# EAGLE board Board (EAGLE 9.7.0)
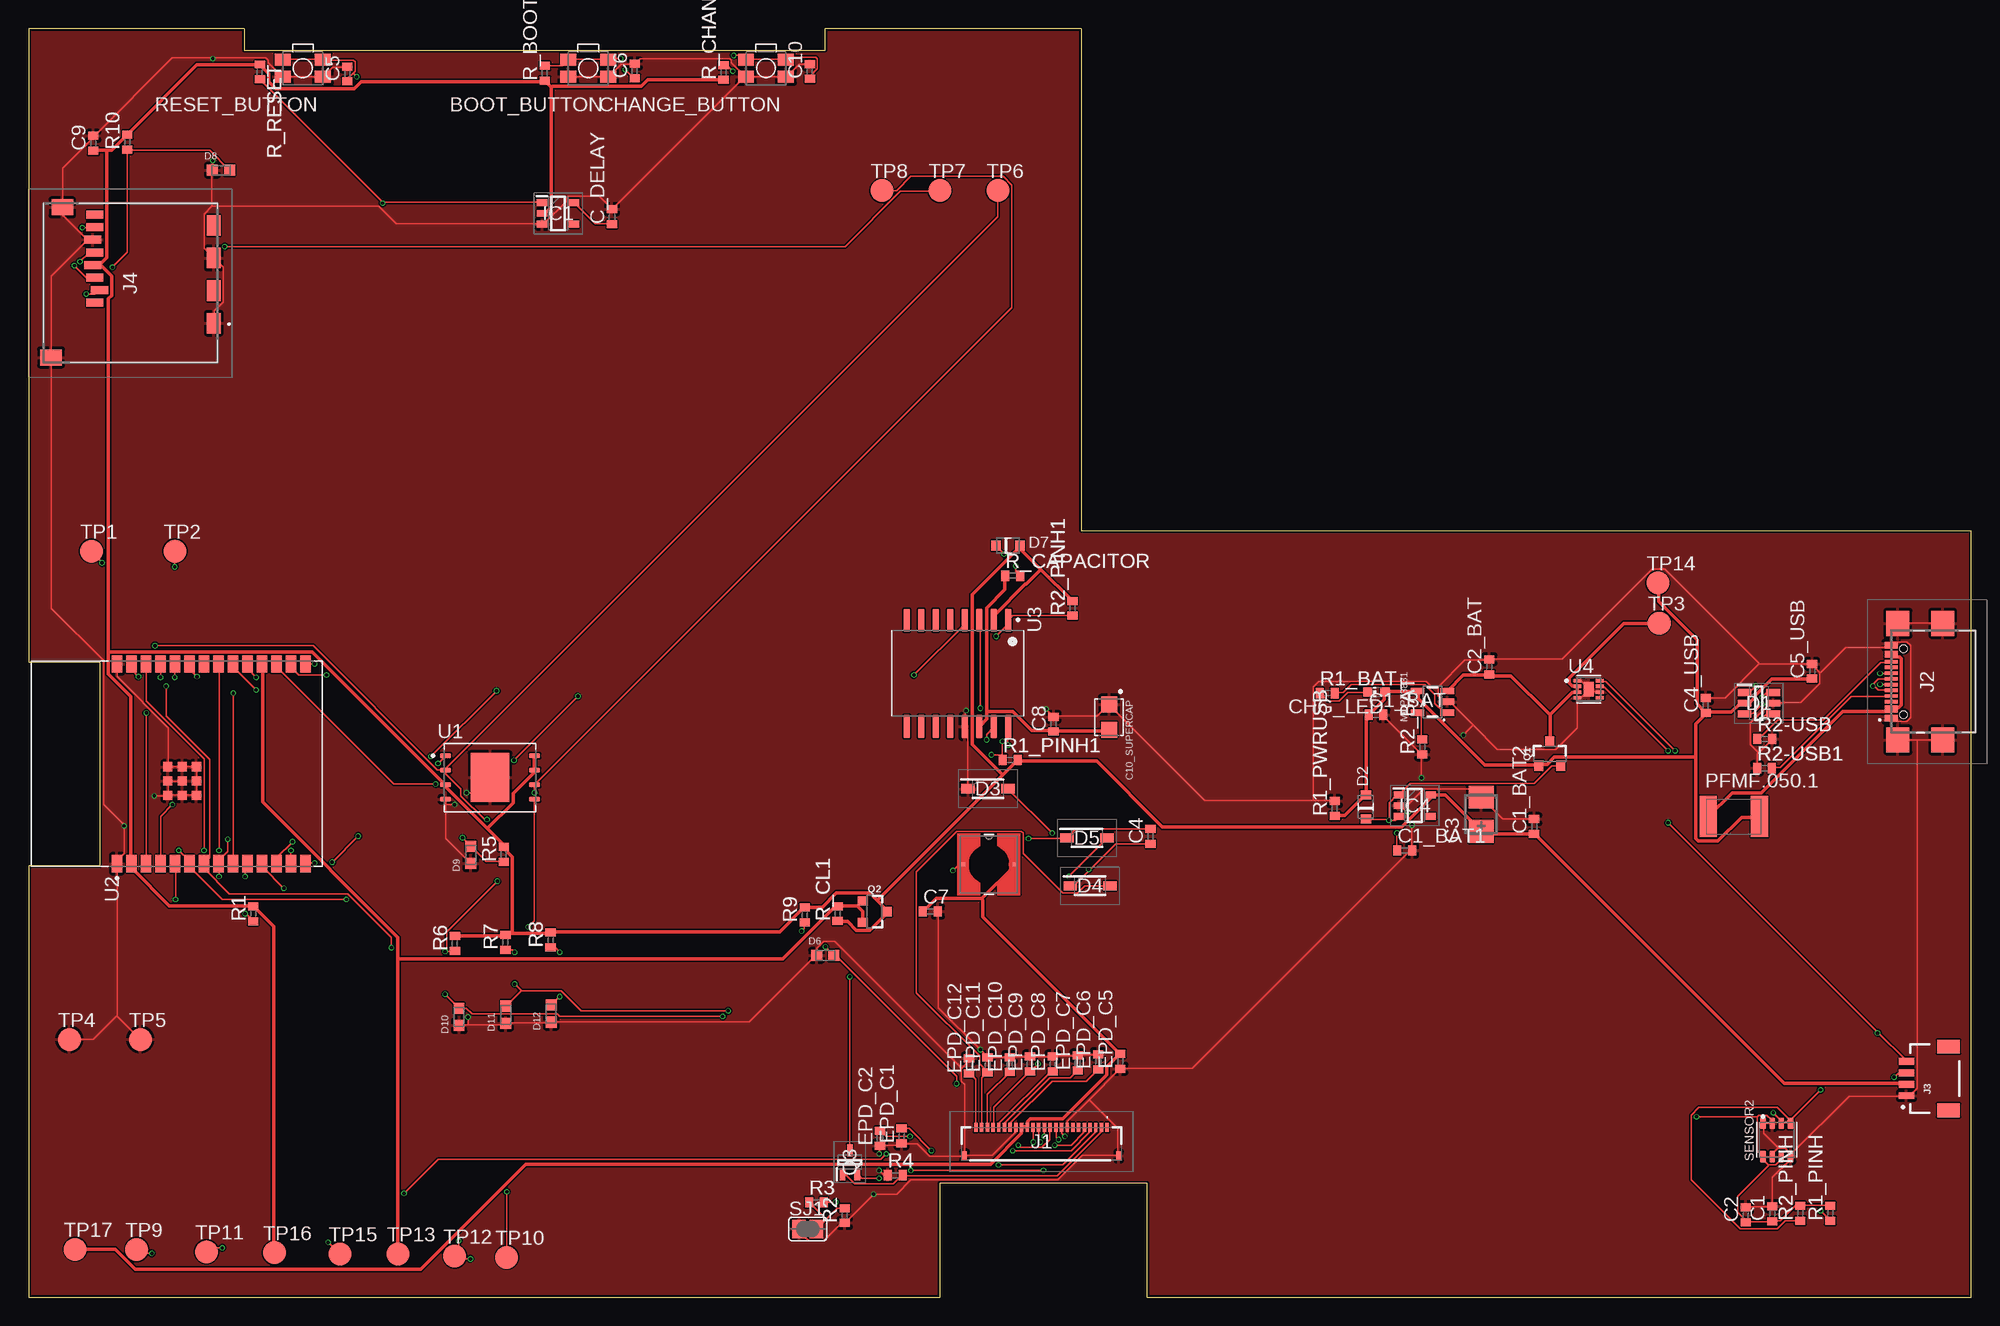
[diagram p0: board, top side]
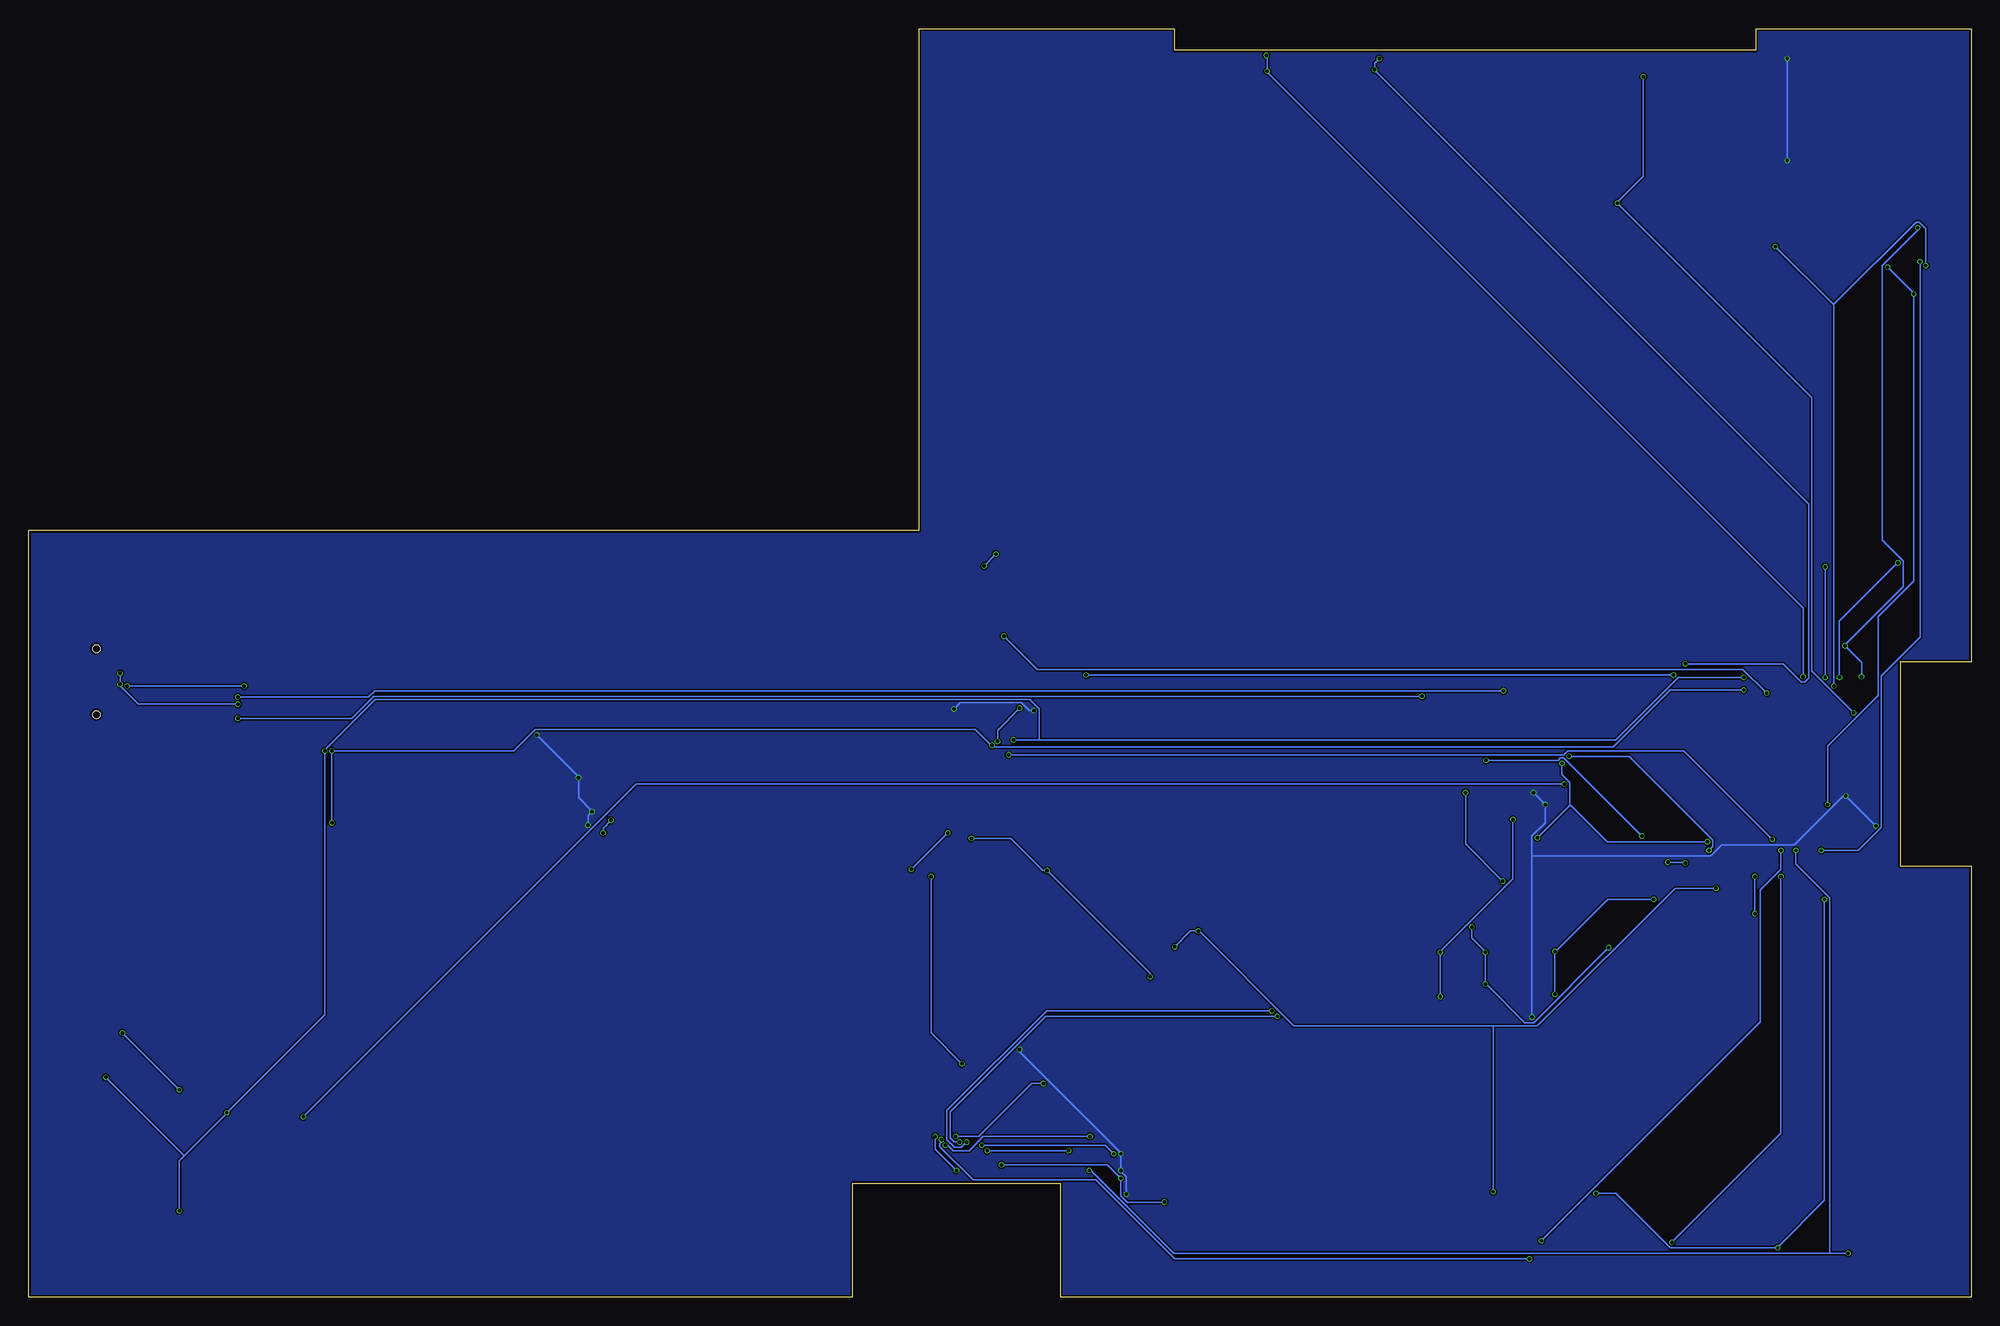
[diagram p1: board, bottom side, seen from below]

Size 170.2 x 111.2 mm. Coordinates in mm from the lower left corner, seen from the top.
Outline: 0,0 79.81,0 79.81,10 98.01,10 98.01,0 170.2,0 170.2,67.2 92.2,67.2 92.2,111.2 69.8,111.2 69.8,109.3 18.9,109.3 18.9,111.2 0,111.2 0,55.7 6.25,55.7 6.25,37.8 0,37.8 0,0
Copper layers (1*16): Top 0.035mm / dielectric 1.6mm / Bottom 0.035mm
Design rules "jlcpcb-2layers.dru": minimum track width 0.15mm, minimum drill 0.3mm, track to track 5mil, track to pad 5mil, pad to pad 5mil, via to via 5mil, smd to smd 5mil, copper to edge 0.2mm, drill to drill 6mil, minimum pad ring 10mil, minimum via ring 3mil, stop-mask expansion 4mil, vias tented up to drill 0mil, thermal gap 10mil
Net classes: 1 power: width 0.3 mm

## Footprints (pad centres in the part's own frame; a part is rotated, then mirrored left to right if it is on the bottom)
MYBUTTON = smd 1.4 x 1.05: 1 1.75,0.75; 2 -1.75,0.75; 3 -1.75,-0.75; 4 1.75,-0.75
ESP32_WROVER_EAGLE-LTSPICE_C0402 = smd 0.7 x 0.9: 1 -0.65,0; 2 0.65,0
RCL_CT3528 = smd 2 x 2.2: + -1.5,0; - 1.5,0
CAPCP3225X100N = smd 1.4 x 1.4: 1 -1.1,0; 2 1.1,0
ADAFRUIT_CHIP-LED0603 = smd 0.8 x 0.8: A 0,-0.75; C 0,0.75
SOT95P280X145-6N = smd 1.2 x 0.6: 1 -1.25,0.95; 2 -1.25,0; 3 -1.25,-0.95; 4 1.25,-0.95; 5 1.25,0; 6 1.25,0.95
ESP32_WROVER_AVX---SD0805S020S1R0_AVX_SD0805S020S1R0_0 = smd 0.8 x 0.9: 1 -1.05,0; 2 1.05,0
SOD3716X135N = smd 1.15 x 0.8: 1 -1.75,0; 2 1.75,0
DIOC1608X36N = smd 0.97 x 0.94: 1 -0.75,0; 2 0.75,0
SOT95P280X125-5N = smd 0.9 x 0.6: 1 -1.4,0.95; 2 -1.4,0; 3 -1.4,-0.95; 4 1.4,-0.95; 5 1.4,0.95
SOT95P280X120-5N = smd 0.9 x 0.6: 1 -1.4,0.95; 2 -1.4,0; 3 -1.4,-0.95; 4 1.4,-0.95; 5 1.4,0.95
FH34SRJ24S05SH99 = smd 0.3 x 0.8: 1 5.75,1.45; 2 5.25,1.45; 3 4.75,1.45; 4 4.25,1.45; 5 3.75,1.45; 6 3.25,1.45; 7 2.75,1.45; 8 2.25,1.45; 9 1.75,1.45; 10 1.25,1.45; 11 0.75,1.45; 12 0.25,1.45; 13 -0.25,1.45; 14 -0.75,1.45; 15 -1.25,1.45; 16 -1.75,1.45; 17 -2.25,1.45; 18 -2.75,1.45; 19 -3.25,1.45; 20 -3.75,1.45; 21 -4.25,1.45; 22 -4.75,1.45; 23 -5.25,1.45; 24 -5.75,1.45 | smd 0.4 x 0.8: MP1 6.75,-1.05; MP2 -6.75,-1.05
SAMACSYS_PARTS_USB4110GFA = smd 0.3 x 1.15: A1 -3.35,3.678; A4 -2.55,3.678; A5 -1.25,3.678; A6 -0.25,3.678; A7 0.25,3.678; A8 1.25,3.678; A9 2.55,3.678; A12 3.35,3.678; B1 3.05,3.678; B4 2.25,3.678; B5 1.75,3.678; B6 0.75,3.678; B7 -0.75,3.678; B8 -1.75,3.678; B9 -2.25,3.678; B12 -3.05,3.678 | smd 2.18 x 2: MP1 -5.11,-0.827; MP2 5.11,-0.827; MP3 -5.11,3.103; MP4 5.11,3.103 | hole 0.65: -2.89,2.603; 2.89,2.603
JST04_1MM_RA = smd 0.6 x 1.35: 1 -1.5,0; 2 -0.5,0; 3 0.5,0; 4 1.5,0 | smd 1.2 x 2: NC1 2.8,-3.675; NC2 -2.8,-3.675
112ATAARR03ATTEND = smd 1.8 x 1.2: G1 10.6,10.4; G2 4.9,10.4; S1 7.75,10.4; S2 2.05,10.4 | smd 1.4 x 1.9: G3 13.6,-3.85; G4 0.45,-2.85 | smd 0.7 x 1.5: P1 8.8,0; P2 7.7,0.4; P3 6.6,0; P4 5.5,-0.2; P5 4.4,0; P6 3.3,-0.2; P7 2.2,0; P8 1.1,0
IND_4828-WE-TPC_WRE = smd 0.381 x 0.381: 1 -2.286,0; 2 2.286,0
ESP32_WROVER_SPARKFUN-IC-POWER_SOT23-5 = smd 0.55 x 1.2: 1 -0.95,-1.3; 2 0,-1.3; 3 0.95,-1.3; 4 0.95,1.3; 5 -0.95,1.3
ESP32C6_VARISTOR_CT/CN1812 = smd 1.5 x 3.6: 1 -2.25,0; 2 2.25,0
ESP32_WROVER_SPARKFUN-DISCRETESEMI_SOT23-3 = smd 0.8 x 0.9: 1 -0.95,-1; 2 0.95,-1; 3 0,1.1
SOT65P210X110-3N = smd 1.05 x 0.5: 1 -1.05,0.65; 2 -1.05,-0.65; 3 1.05,0
ESP32_WROVER_EAGLE-LTSPICE_R0402 = smd 0.7 x 0.9: 1 -0.65,0; 2 0.65,0
ESP32_WROVER_BME680_PSON80P300X300X100-8N = smd 1.016 x 0.5: 1 1.458,1.2; 2 1.458,0.4; 3 1.458,-0.4; 4 1.458,-1.2; 5 -1.458,-1.22; 6 -1.458,-0.4; 7 -1.458,0.4; 8 -1.458,1.2
SJ = smd 1.168 x 1.6: 1 -0.762,0; 2 0.762,0
TP20R = smd 2 x 2: TP 0,0
SON127P600X800X80-9N = smd 0.94 x 0.44: 1 -3.895,1.905; 2 -3.895,0.635; 3 -3.895,-0.635; 4 -3.895,-1.905; 5 3.895,-1.905; 6 3.895,-0.635; 7 3.895,0.635; 8 3.895,1.905 | smd 3.4 x 4.3: 9 0,0
XCVR_ESP32-C6-WROOM-1-N8 = smd 1.5 x 0.9: 1 -8.75,5.26; 2 -8.75,3.99; 3 -8.75,2.72; 4 -8.75,1.45; 5 -8.75,0.18; 6 -8.75,-1.09; 7 -8.75,-2.36; 8 -8.75,-3.63; 9 -8.75,-4.9; 10 -8.75,-6.17; 11 -8.75,-7.44; 12 -8.75,-8.71; 13 -8.75,-9.98; 14 -8.75,-11.25; 15 8.75,-11.25; 16 8.75,-9.98; 17 8.75,-8.71; 18 8.75,-7.44; 19 8.75,-6.17; 20 8.75,-4.9; 21 8.75,-3.63; 22 8.75,-2.36; 23 8.75,-1.09; 24 8.75,0.18; 25 8.75,1.45; 26 8.75,2.72; 27 8.75,3.99; 28 8.75,5.26 | smd 0.8 x 0.8: 29_1 -2.755,0.79; 29_2 -1.505,0.79; 29_3 -0.255,0.79; 29_4 -2.755,-0.46; 29_5 -1.505,-0.46; 29_6 -0.255,-0.46; 29_7 -2.755,-1.71; 29_8 -1.505,-1.71; 29_9 -0.255,-1.71
SOIC127P1032X265-16N = smd 2.05 x 0.59: 1 -4.655,4.445; 2 -4.655,3.175; 3 -4.655,1.905; 4 -4.655,0.635; 5 -4.655,-0.635; 6 -4.655,-1.905; 7 -4.655,-3.175; 8 -4.655,-4.445; 9 4.655,-4.445; 10 4.655,-3.175; 11 4.655,-1.905; 12 4.655,-0.635; 13 4.655,0.635; 14 4.655,1.905; 15 4.655,3.175; 16 4.655,4.445
SON50P200X200X80-9N = smd 0.76 x 0.27: 1 -0.985,0.75; 4 -0.985,-0.75; 5 0.985,-0.75; 6 0.985,-0.25; 7 0.985,0.25; 8 0.985,0.75 | smd 0.76 x 0.3: 2 -0.985,0.25; 3 -0.985,-0.25 | smd 0.9 x 1.3: 9 0,0

## Placement (x,y rotation side)
BOOT_BUTTON  BUTTON_CUSYOMV1  [MYBUTTON]  49.03,107.71 180 top
C1  100nF  [ESP32_WROVER_EAGLE-LTSPICE_C0402]  152.75,7.34 90 top
C1_BAT  4.7uF  [ESP32_WROVER_EAGLE-LTSPICE_C0402]  118.04,51.06 0 top
C1_BAT1  4.7uF  [ESP32_WROVER_EAGLE-LTSPICE_C0402]  120.55,39.18 0 top
C1_BAT2  4.7uF  [ESP32_WROVER_EAGLE-LTSPICE_C0402]  131.89,41.28 90 top
C2  100nF  [ESP32_WROVER_EAGLE-LTSPICE_C0402]  150.43,7.24 90 top
C2_BAT  4.7uF  [ESP32_WROVER_EAGLE-LTSPICE_C0402]  127.95,55.26 90 top
C3  100uF TANT  [RCL_CT3528]  127.25,42.34 90 top
C4  4.7uF/25V  [ESP32_WROVER_EAGLE-LTSPICE_C0402]  98.29,40.4 90 top
C4_USB  100nF  [ESP32_WROVER_EAGLE-LTSPICE_C0402]  146.93,51.88 90 top
C5  1uF  [ESP32_WROVER_EAGLE-LTSPICE_C0402]  27.91,107.22 90 top
C5_USB  4.7uF  [ESP32_WROVER_EAGLE-LTSPICE_C0402]  156.24,54.88 90 top
C6  100nF  [ESP32_WROVER_EAGLE-LTSPICE_C0402]  53.11,107.48 90 top
C7  10uF  [ESP32_WROVER_EAGLE-LTSPICE_C0402]  79,33.84 0 top
C8  100nF  [ESP32_WROVER_EAGLE-LTSPICE_C0402]  89.79,50.24 90 top
C9  100nF  [ESP32_WROVER_EAGLE-LTSPICE_C0402]  5.67,101.14 90 top
C10  100nF  [ESP32_WROVER_EAGLE-LTSPICE_C0402]  68.45,107.44 90 top
C10_SUPERCAP  CPH3225A  [CAPCP3225X100N]  94.66,50.85 270 top
C_DELAY  100nF  [ESP32_WROVER_EAGLE-LTSPICE_C0402]  51.11,94.7 90 top
CHANGE_BUTTON  BUTTON_CUSYOMV1  [MYBUTTON]  64.6,107.71 180 top
CHG_LED  [ADAFRUIT_CHIP-LED0603]  118.08,53.05 90 top
D1  USBLC6-2SC6Y  [SOT95P280X145-6N]  151.58,52.08 0 top
D2  ESP32_WROVER_AVX---SD0805S020S1R0_AVX_SD0805S020S1R0_0_0AVX_SD0805S020S1R0_0_0  [ESP32_WROVER_AVX---SD0805S020S1R0_AVX_SD0805S020S1R0_0]  117.15,42.99 90 top
D3  MBR0530  [SOD3716X135N]  84.05,44.58 0 top
D4  MBR0530  [SOD3716X135N]  92.99,36.08 0 top
D5  MBR0530  [SOD3716X135N]  92.72,40.26 0 top
D6  PGB1010603MR  [DIOC1608X36N]  69.78,29.98 0 top
D7  ESP32_WROVER_AVX---SD0805S020S1R0_AVX_SD0805S020S1R0_0_0AVX_SD0805S020S1R0_0_0  [ESP32_WROVER_AVX---SD0805S020S1R0_AVX_SD0805S020S1R0_0]  85.8,65.89 0 top
D8  PGB1010603MR  [DIOC1608X36N]  16.86,98.78 0 top
D9  PGB1010603MR  [DIOC1608X36N]  38.74,38.78 90 top
D10  PGB1010603MR  [DIOC1608X36N]  37.72,24.58 90 top
D11  PGB1010603MR  [DIOC1608X36N]  41.8,24.78 90 top
D12  PGB1010603MR  [DIOC1608X36N]  45.78,24.88 90 top
EPD_C1  1uF/50V  [ESP32_WROVER_EAGLE-LTSPICE_C0402]  76.48,14.16 90 top
EPD_C2  1uF/50V  [ESP32_WROVER_EAGLE-LTSPICE_C0402]  74.59,13.96 90 top
EPD_C5  0.1uF/50V  [ESP32_WROVER_EAGLE-LTSPICE_C0402]  95.63,20.7 90 top
EPD_C6  1uF/50V  [ESP32_WROVER_EAGLE-LTSPICE_C0402]  93.7,20.66 90 top
EPD_C7  1uF/50V  [ESP32_WROVER_EAGLE-LTSPICE_C0402]  91.91,20.56 90 top
EPD_C8  1uF/50V  [ESP32_WROVER_EAGLE-LTSPICE_C0402]  89.72,20.46 90 top
EPD_C9  1uF/50V  [ESP32_WROVER_EAGLE-LTSPICE_C0402]  87.73,20.46 90 top
EPD_C10  1uF/50V  [ESP32_WROVER_EAGLE-LTSPICE_C0402]  85.95,20.4 90 top
EPD_C11  1uF/50V  [ESP32_WROVER_EAGLE-LTSPICE_C0402]  84.01,20.38 90 top
EPD_C12  1uF/50V  [ESP32_WROVER_EAGLE-LTSPICE_C0402]  82.39,20.3 90 top
IC1  BD5229G-TR  [SOT95P280X125-5N]  46.39,95 0 top
IC4  XC6220A331MR-G  [SOT95P280X120-5N]  121.43,43.1 0 top
J1  FH34SRJ-24S-0.5SH_99_  [FH34SRJ24S05SH99]  88.74,13.45 0 top
J2  SAMACSYS_PARTS_USB4110-GF-A  [SAMACSYS_PARTS_USB4110GFA]  166.86,53.96 90 top
J3  QWIIC_RIGHT_ANGLE  [JST04_1MM_RA]  164.51,19.19 90 top
J4  112A-TAAR-R03_ATTEND  [112ATAARR03ATTEND]  5.82,95.98 270 top
L1  744043680IND_4828-WE-TPC_WRE  [IND_4828-WE-TPC_WRE]  84.13,37.95 0 top
MCP73831  ESP32_WROVER_SPARKFUN-IC-POWER_MCP73831  [ESP32_WROVER_SPARKFUN-IC-POWER_SOT23-5]  122.98,52.2 90 top
PFMF.050.1  ESP32C6_VARISTORCN1812  [ESP32C6_VARISTOR_CT/CN1812]  149.38,42.14 0 top
Q1  20V/4.2A/52mΩ/1.4W  [ESP32_WROVER_SPARKFUN-DISCRETESEMI_SOT23-3]  133.26,47.61 0 top
Q2  20V/4.2A/52mΩ/1.4W  [ESP32_WROVER_SPARKFUN-DISCRETESEMI_SOT23-3]  74.08,33.81 270 top
Q3  SI1308EDL-T1-GE3  [SOT65P210X110-3N]  71.95,11.86 90 top
R1  10K  [ESP32_WROVER_EAGLE-LTSPICE_R0402]  19.69,33.62 90 top
R1_BAT  200  [ESP32_WROVER_EAGLE-LTSPICE_R0402]  113.76,52.96 0 top
R1_PINH  10K  [ESP32_WROVER_EAGLE-LTSPICE_R0402]  157.83,7.38 90 top
R1_PINH1  10K  [ESP32_WROVER_EAGLE-LTSPICE_R0402]  86.01,47.1 0 top
R1_PWRUSB  100K  [ESP32_WROVER_EAGLE-LTSPICE_R0402]  114.42,42.85 90 top
R2  2.2  [ESP32_WROVER_EAGLE-LTSPICE_R0402]  71.5,7.18 90 top
R2-USB  5k1  [ESP32_WROVER_EAGLE-LTSPICE_R0402]  152.09,48.94 0 top
R2-USB1  5k1  [ESP32_WROVER_EAGLE-LTSPICE_R0402]  152.07,46.38 0 top
R2_BAT  2K  [ESP32_WROVER_EAGLE-LTSPICE_R0402]  122.08,48.24 90 top
R2_PINH  10K  [ESP32_WROVER_EAGLE-LTSPICE_R0402]  155.21,7.38 90 top
R2_PINH1  10K  [ESP32_WROVER_EAGLE-LTSPICE_R0402]  91.45,60.4 90 top
R3  0.47  [ESP32_WROVER_EAGLE-LTSPICE_R0402]  69.02,8.34 0 top
R4  10K  [ESP32_WROVER_EAGLE-LTSPICE_R0402]  75.91,10.72 0 top
R5  10K  [ESP32_WROVER_EAGLE-LTSPICE_R0402]  41.63,38.82 90 top
R6  10K  [ESP32_WROVER_EAGLE-LTSPICE_R0402]  37.35,31.02 90 top
R7  10K  [ESP32_WROVER_EAGLE-LTSPICE_R0402]  41.77,31.12 90 top
R8  10k  [ESP32_WROVER_EAGLE-LTSPICE_R0402]  45.73,31.32 90 top
R9  10K  [ESP32_WROVER_EAGLE-LTSPICE_R0402]  67.99,33.52 90 top
R10  10K  [ESP32_WROVER_EAGLE-LTSPICE_R0402]  8.64,101.24 90 top
R_BOOT  10K  [ESP32_WROVER_EAGLE-LTSPICE_R0402]  45.22,107.28 90 top
R_CAPACITOR  15  [ESP32_WROVER_EAGLE-LTSPICE_R0402]  86.22,63.25 0 top
R_CHANGE  10K  [ESP32_WROVER_EAGLE-LTSPICE_R0402]  60.89,107.35 90 top
R_CL1  10K  [ESP32_WROVER_EAGLE-LTSPICE_R0402]  70.87,33.64 90 top
R_RESET  10K  [ESP32_WROVER_EAGLE-LTSPICE_R0402]  20.27,107.4 270 top
RESET_BUTTON  BUTTON_CUSYOMV1  [MYBUTTON]  24.03,107.71 180 top
SENSOR2  ESP32_WROVER_BME680_BME6801  [ESP32_WROVER_BME680_PSON80P300X300X100-8N]  153.14,13.8 90 top
SJ1  [SJ]  68.26,6 0 top
TP1  TPTP20R  [TP20R]  5.51,65.4 0 top
TP2  TPTP20R  [TP20R]  12.83,65.4 0 top
TP3  TPTP20R  [TP20R]  142.85,59.1 0 top
TP4  TPTP20R  [TP20R]  3.57,22.6 0 top
TP5  TPTP20R  [TP20R]  9.79,22.6 0 top
TP6  TPTP20R  [TP20R]  84.91,97 0 top
TP7  TPTP20R  [TP20R]  79.83,97 0 top
TP8  TPTP20R  [TP20R]  74.75,97 0 top
TP9  TPTP20R  [TP20R]  9.47,4.2 0 top
TP10  TPTP20R  [TP20R]  41.88,3.52 0 top
TP11  TPTP20R  [TP20R]  15.59,4 0 top
TP12  TPTP20R  [TP20R]  37.33,3.62 0 top
TP13  TPTP20R  [TP20R]  32.38,3.82 0 top
TP14  TPTP20R  [TP20R]  142.73,62.62 0 top
TP15  TPTP20R  [TP20R]  27.28,3.82 0 top
TP16  TPTP20R  [TP20R]  21.53,3.92 0 top
TP17  TPTP20R  [TP20R]  4.08,4.22 0 top
U1  W25Q512JVEIQ  [SON127P600X800X80-9N]  40.43,45.56 0 top
U2  ESP32-C6-WROOM-1-N8  [XCVR_ESP32-C6-WROOM-1-N8]  13,46.76 90 top
U3  DS3231SN#  [SOIC127P1032X265-16N]  81.39,54.7 270 top
U4  MAX17048G+T10  [SON50P200X200X80-9N]  136.67,53.3 0 top

## Library data of the parts
BOOT_BUTTON CHANGE_BUTTON CHG_LED PFMF.050.1 RESET_BUTTON SENSOR2 SJ1 TP1-TP17 = DeskAssistant v19 v1
C1 C1_BAT C1_BAT1 C1_BAT2 C2 C2_BAT C4 C4_USB C5 C5_USB C6-C10 C_DELAY EPD_C1 EPD_C2 EPD_C5-EPD_C12 = DeskAssistant v19 v1; SPICEMODEL: NONE; SPICEPREFIX: C
C3 = DeskAssistant v19 v1; SPICEPREFIX: C
C10_SUPERCAP = DeskAssistant v19 v1; AVAILABILITY: Not in stock; CHECK_PRICES: https://www.snapeda.com/parts/CPH3225A/Seiko+Instruments/view-part/?ref=eda; DESCRIPTION: 11 mF (EDLC) Supercapacitor 3.3 V 1210 (3225 Metric) - -; MF: Seiko Instruments; MP: CPH3225A; PACKAGE: 1210 Seiko; PRICE: None; PURCHASE-URL: https://www.snapeda.com/api/url_track_click_mouser/?unipart_id=562593&manufacturer=Seiko Instruments&part_name=CPH3225A&search_term=None; SNAPEDA_LINK: https://www.snapeda.com/parts/CPH3225A/Seiko+Instruments/view-part/?ref=snap
D1 = DeskAssistant v19 v1; AVAILABILITY: In Stock; CHECK_PRICES: https://www.snapeda.com/parts/USBLC6-2SC6Y/STMicroelectronics/view-part/?ref=eda; DESCRIPTION: 17V Clamp 5A (8/20µs) Ipp Tvs Diode Surface Mount SOT-23-6; MF: STMicroelectronics; MP: USBLC6-2SC6Y; PACKAGE: SOT-23-6 STMicroelectronics; PRICE: None; SNAPEDA_LINK: https://www.snapeda.com/parts/USBLC6-2SC6Y/STMicroelectronics/view-part/?ref=snap
D2 D7 = DeskAssistant v19 v1; CENTROID_NOT_SPECIFIED: No; DATASHEET: http://datasheets.avx.com/schottky.pdf; DIGIKEY_DESCRIPTION: DIODE SCHOTTKY 20V 1A 0805; DIGIKEY_PART_NUMBER: 478-7800-1-ND; LEAD_FREE: yes; MF: AVX; MOUSER_PART_NUMBER: 581-SD0805S020S1R0; PACKAGE: 0805 (2012 metric); PREFIX: D; ROHS: yes; TEMPERATURE_RANGE_HIGH: +125°C; TEMPERATURE_RANGE_LOW: -55°C
D3-D5 = DeskAssistant v19 v1; AVAILABILITY: In Stock; CHECK_PRICES: https://www.snapeda.com/parts/MBR0530/Onsemi/view-part/?ref=eda; DESCRIPTION: Diode Schottky 30 V 500mA Surface Mount SOD-123; MF: ON Semiconductor; MP: MBR0530; PACKAGE: SOD-123-2 ON Semiconductor; PRICE: None; PURCHASE-URL: https://www.snapeda.com/api/url_track_click_mouser/?unipart_id=179458&manufacturer=ON Semiconductor&part_name=MBR0530&search_term=None; SNAPEDA_LINK: https://www.snapeda.com/parts/MBR0530/Onsemi/view-part/?ref=snap
D6 D8-D12 = DeskAssistant v19 v1; AVAILABILITY: In Stock; CHECK_PRICES: https://www.snapeda.com/parts/PGB1010603MR/Littelfuse/view-part/?ref=eda; DESCRIPTION: 150V (Typ) Clamp - Ipp Tvs Diode Surface Mount 0603 (1608 Metric); MF: Littelfuse Inc.; MP: PGB1010603MR; PACKAGE: 0603 Littelfuse Inc.; PRICE: None; PURCHASE-URL: https://www.snapeda.com/api/url_track_click_mouser/?unipart_id=5659453&manufacturer=Littelfuse Inc.&part_name=PGB1010603MR&search_term=None; SNAPEDA_LINK: https://www.snapeda.com/parts/PGB1010603MR/Littelfuse/view-part/?ref=snap
IC1 = DeskAssistant v19 v1; DESCRIPTION: Voltage Detector with Adjustable Delay Time: CMOS processes are utilized to develop high precision, low current consumption CMOS reset ICs that allow arbitrary setting of the delay time. The extensive lineup includes both Nch Open Drain and CMOS output types in a wide range of detection voltages (from 2.3V to 6.0V, in 0.1V steps), enabling selection of the ideal solution based on customer requirements. In addition, the entire series is of course both lead-free and RoHS-compliant.; HEIGHT: 1.25mm; MANUFACTURER_NAME: ROHM Semiconductor; MANUFACTURER_PART_NUMBER: BD5229G-TR; MOUSER_PART_NUMBER: 755-BD5229G-TR; MOUSER_PRICE-STOCK: https://www.mouser.co.uk/ProductDetail/ROHM-Semiconductor/BD5229G-TR?qs=4kLU8WoGk0vvnhrrYwdszw%3D%3D
IC4 = DeskAssistant v19 v1; DESCRIPTION: LDO Voltage Regulators; HEIGHT: 1.2mm; MANUFACTURER_NAME: Torex; MANUFACTURER_PART_NUMBER: XC6220A331MR-G; MOUSER_PART_NUMBER: 865-XC6220A331MR-G; MOUSER_PRICE-STOCK: https://www.mouser.co.uk/ProductDetail/Torex-Semiconductor/XC6220A331MR-G?qs=AsjdqWjXhJ8ZSWznL1J0gg%3D%3D
J1 = DeskAssistant v19 v1; DESCRIPTION: 24 Position FFC, FPC Connector Contacts, Top and Bottom 0.020" (0.50mm) Surface Mount, Right Angle; HEIGHT: 1.1mm; MANUFACTURER_NAME: Hirose; MANUFACTURER_PART_NUMBER: FH34SRJ-24S-0.5SH(99); MOUSER_PART_NUMBER: 798-FH34SRJ24S05SH99; MOUSER_PRICE-STOCK: https://www.mouser.co.uk/ProductDetail/Hirose-Connector/FH34SRJ-24S-0.5SH99?qs=vcbW%252B4%252BSTIpKBl5ap9J8Fw%3D%3D
J2 = DeskAssistant v19 v1; DESCRIPTION: CONN USB 2.0 TYPE-C R/A SMT; HEIGHT: 3.26mm; MANUFACTURER_NAME: GCT (GLOBAL CONNECTOR TECHNOLOGY); MANUFACTURER_PART_NUMBER: USB4110-GF-A; MOUSER_PART_NUMBER: 640-USB4110-GF-A; MOUSER_PRICE-STOCK: https://www.mouser.co.uk/ProductDetail/GCT/USB4110-GF-A?qs=KUoIvG%2F9IlYiZvIXQjyJeA%3D%3D
J3 = DeskAssistant v19 v1; PROD_ID: CONN-13694
J4 = DeskAssistant v19 v1; DESCRIPTION: Micro SD Card Socket, Push-Push Type, Top Mount, SMT, H=1.83mm, 10u; HEIGHT: 1.9mm; MANUFACTURER_NAME: ATTEND; MANUFACTURER_PART_NUMBER: 112A-TAAR-R03 ATTEND
L1 = DeskAssistant v19 v1; COPYRIGHT: Copyright (C) 2024 Ultra Librarian. All rights reserved.; MANUFACTURER_PART_NUMBER: 744043680; MFR_NAME: Wurth Electronics
MCP73831 = DeskAssistant v19 v1; PROD_ID: IC-09995
Q1 Q2 = DeskAssistant v19 v1; PROD_ID: TRAN-14388
Q3 = DeskAssistant v19 v1; AVAILABILITY: In Stock; CHECK_PRICES: https://www.snapeda.com/parts/SI1308EDL-T1-GE3/Vishay+Siliconix/view-part/?ref=eda; DESCRIPTION: Si1308EDL-T1-GE3 N-channel MOSFET Transistor, 1.5 A, 30 V, 3-Pin SC-70 | Siliconix / Vishay SI1308EDL-T1-GE3; MF: Vishay Siliconix; MP: SI1308EDL-T1-GE3; PACKAGE: SOT-323 Vishay Semiconductor; PRICE: None; PURCHASE-URL: https://www.snapeda.com/api/url_track_click_mouser/?unipart_id=274603&manufacturer=Vishay Siliconix&part_name=SI1308EDL-T1-GE3&search_term=None; SNAPEDA_LINK: https://www.snapeda.com/parts/SI1308EDL-T1-GE3/Vishay+Siliconix/view-part/?ref=snap
R1 R1_BAT R1_PINH R1_PINH1 R1_PWRUSB R2 R2-USB R2-USB1 R2_BAT R2_PINH R2_PINH1 R3-R10 R_BOOT R_CAPACITOR R_CHANGE R_CL1 R_RESET = DeskAssistant v19 v1; SPICEMODEL: NONE; SPICEPREFIX: R
U1 = DeskAssistant v19 v1; AVAILABILITY: In Stock; CHECK_PRICES: https://www.snapeda.com/parts/W25Q512JVEIQ/Winbond+Electronics/view-part/?ref=eda; DESCRIPTION: FLASH - NOR Memory IC 512Mb (64M x 8) SPI - Quad I/O 133 MHz 8-WSON (8x6); MF: Winbond Electronics; MP: W25Q512JVEIQ; PACKAGE: Package; PRICE: None; SNAPEDA_LINK: https://www.snapeda.com/parts/W25Q512JVEIQ/Winbond+Electronics/view-part/?ref=snap
U2 = DeskAssistant v19 v1; AVAILABILITY: In Stock; CHECK_PRICES: https://www.snapeda.com/parts/ESP32-C6-WROOM-1-N8/Espressif+Systems/view-part/?ref=eda; DESCRIPTION: Multiprotocol Modules ESP32-C6 module, Wi-Fi 6 in 2.4 GHz band, Bluetooth 5, Zigbee 3.0 and Thread. ESP34-WROOM Compatible - ENGINEERING SAMPLE; MF: Espressif Systems; MP: ESP32-C6-WROOM-1-N8; PACKAGE: None; PRICE: None; SNAPEDA_LINK: https://www.snapeda.com/parts/ESP32-C6-WROOM-1-N8/Espressif+Systems/view-part/?ref=snap
U3 = DeskAssistant v19 v1; AVAILABILITY: In Stock; CHECK_PRICES: https://www.snapeda.com/parts/DS3231SN%23/Analog+Devices/view-part/?ref=eda; DESCRIPTION: Extremely Accurate I²C-Integrated RTC/TCXO/Crystal; MF: Analog Devices; MP: DS3231SN#; PACKAGE: SOIC-16 Maxim; PRICE: None; PURCHASE-URL: https://www.snapeda.com/api/url_track_click_mouser/?unipart_id=99048&manufacturer=Analog Devices&part_name=DS3231SN#&search_term=None; SNAPEDA_LINK: https://www.snapeda.com/parts/DS3231SN%23/Analog+Devices/view-part/?ref=snap
U4 = DeskAssistant v19 v1; AVAILABILITY: In Stock; CHECK_PRICES: https://www.snapeda.com/parts/MAX17048G+T10/Analog+Devices/view-part/?ref=eda; DESCRIPTION: 3µA 1-Cell/2-Cell Fuel Gauge with ModelGauge; MF: Analog Devices; MP: MAX17048G+T10; PACKAGE: TDFN-8 Maxim; PRICE: None; PURCHASE-URL: https://www.snapeda.com/api/url_track_click_mouser/?unipart_id=329239&manufacturer=Analog Devices&part_name=MAX17048G+T10&search_term=None; SNAPEDA_LINK: https://www.snapeda.com/parts/MAX17048G+T10/Analog+Devices/view-part/?ref=snap

## Nets
3V3 [power]: C1_BAT2.1 C3.+ C9.1 D7.2 IC1.2 IC4.5 J3.2 J4.P4 Q2.3 R1.2 R1_PINH1.2 R2_PINH1.2 R5.2 R6.2 R7.2 R8.2 R9.2 R10.2 R_BOOT.1 R_CHANGE.1 R_CL1.1 R_RESET.1 TP16.TP U1.3 U1.7 U1.8 U2.2 U3.2
32KHZ: R2_PINH1.1 U2.9 U3.1
DN: D1.1 J2.A7 J2.B7
DP: D1.3 J2.A6 J2.B6
EPD_3V3 [power]: C7.1 EPD_C5.2 J1.15 J1.16 L1.2 TP17.TP
EPD_3V3_C [power]: Q2.1 Q2.2 R_CL1.2 TP13.TP U2.18
EPD_BUSY: J1.9 TP9.TP U2.26
EPD_CS: D6.2 J1.12 R9.1 TP10.TP U2.11
EPD_DC: J1.11 TP11.TP U2.5
EPD_RST: J1.10 TP12.TP U2.21
FLASH_CS: D9.2 R5.1 U1.1 U2.12
GDR: J1.2 Q3.1 R4.2
GND: BOOT_BUTTON.1 BOOT_BUTTON.2 C1.2 C1_BAT1.2 C1_BAT2.2 C1_BAT.2 C2.2 C2_BAT.2 C3.- C4_USB.2 C5.2 C5_USB.2 C6.2 C7.2 C8.2 C9.2 C10.2 C10_SUPERCAP.1 C_DELAY.2 CHANGE_BUTTON.1 CHANGE_BUTTON.2 D1.5 D3.1 D6.1 D8.1 D9.1 D10.1 D11.1 D12.1 EPD_C1.1 EPD_C2.1 EPD_C5.1 EPD_C6.2 EPD_C7.2 EPD_C8.2 EPD_C9.2 EPD_C10.2 EPD_C11.2 EPD_C12.2 IC1.3 IC4.2 J1.8 J1.17 J1.MP1 J1.MP2 J2.A1 J2.A12 J2.B1 J2.B12 J2.MP1 J2.MP2 J2.MP3 J2.MP4 J3.1 J4.G1 J4.G2 J4.G3 J4.G4 J4.P6 MCP73831.2 R1_PWRUSB.2 R2-USB1.1 R2-USB.2 R2.1 R2_BAT.1 R4.1 RESET_BUTTON.1 RESET_BUTTON.2 SENSOR2.2 SENSOR2.5 SJ1.1 TP4.TP TP5.TP U1.4 U1.9 U2.1 U2.28 U2.29_1 U2.29_2 U2.29_3 U2.29_4 U2.29_5 U2.29_6 U2.29_7 U2.29_8 U2.29_9 U3.13 U4.1 U4.4 U4.6 U4.9
GPIO8: R1.1 U2.10
I2C_PW: C1.1 C2.1 R1_PINH.2 R2_PINH.2 SENSOR2.1 SENSOR2.6 SENSOR2.7 U2.17
INT_RTC: R1_PINH1.1 TP15.TP U2.8 U3.3
IO/BOOT: BOOT_BUTTON.3 BOOT_BUTTON.4 C6.1 R_BOOT.2 U2.15
IO/CHANGE: C10.1 CHANGE_BUTTON.3 CHANGE_BUTTON.4 R_CHANGE.2 U2.23
MISO: D12.2 J4.P7 R8.1 TP6.TP U1.2 U2.27
MOSI: D11.2 J1.14 J4.P3 R7.1 TP7.TP U1.5 U2.7
N$1: J2.A5 R2-USB1.2
N$3: J2.B5 R2-USB.1
N$5: C1_BAT1.1 D2.1 IC4.1 IC4.3 Q1.2
N$7: C4.1 D3.2 D4.1
N$8: MCP73831.5 R2_BAT.2
N$9: MCP73831.1 R1_BAT.2
N$10: CHG_LED.C R1_BAT.1
N$11: EPD_C6.1 J1.18
N$12: D7.1 R_CAPACITOR.2
N$13: EPD_C1.2 J1.4
N$14: EPD_C2.2 J1.5
N$15: EPD_C7.1 J1.19
N$16: EPD_C8.1 J1.20
N$18: EPD_C10.1 J1.22
N$20: EPD_C12.1 J1.24
N$21: C_DELAY.1 IC1.5
PREVGH: D5.2 EPD_C9.1 J1.21
PREVGL: D4.2 EPD_C11.1 J1.23
RESE: J1.3 Q3.2 R3.2
RESE': R2.2 R3.1 SJ1.2
RESET: C5.1 IC1.1 R_RESET.2 RESET_BUTTON.3 RESET_BUTTON.4 U2.3
RTC_RST: U2.16 U3.4
RX: TP2.TP U2.24
SCK: D10.2 J1.13 J4.P5 R6.1 TP8.TP U1.6 U2.6
SCL: J3.4 R2_PINH.1 SENSOR2.3 U2.20 U3.16 U4.7
SDA: J3.3 R1_PINH.1 SENSOR2.4 U2.19 U3.15 U4.8
SRC: C4.2 D5.1 L1.1 Q3.3
SS_SD: D8.2 J4.P2 R10.1 U2.4
TX: TP1.TP U2.25
USB_D+: D1.4 U2.14
USB_D-: D1.6 U2.13
VBAT [power]: C2_BAT.1 MCP73831.3 Q1.3 TP3.TP U4.2 U4.3
VBUS [power]: C1_BAT.1 C4_USB.1 C5_USB.1 CHG_LED.A D1.2 D2.2 MCP73831.4 PFMF.050.1.2 Q1.1 R1_PWRUSB.1 TP14.TP
VRTC [power]: C8.1 C10_SUPERCAP.2 R_CAPACITOR.1 U3.14
VUSB [power]: J2.A4 J2.A9 J2.B4 J2.B9 PFMF.050.1.1

## Tracks (layer width: path | path; a pad name or v marks a point on that pad's centre or on a via)
3V3
  Top 0.3: TP16.TP 21.47,3.93 21.47,32.53 19.8,34.19 R1.2 19.67,34.33 12.33,34.33 9.07,37.58 9.07,38 U2.2 8.93,38.14 8.93,52.68 6.99,54.62 6.99,56.56 | 45.77,106.07 45.77,95.55 45.29,95.06 45.01,95.06 IC1.2 | 45.77,106.07 R_BOOT.1 45.08,106.56 29.15,106.56 28.53,105.93 21.68,105.93 21.05,106.56 21.05,107.25 20.36,107.94 R_RESET.1 20.22,108.01 14.75,108.01 8.73,101.99 R10.2 8.59,101.85 7.27,100.53 6.86,100.53 | R_CHANGE.1 60.87,106.7 54.22,106.7 53.67,106.14 45.91,106.14 45.77,106.07 | 6.86,100.53 5.68,100.53 C9.1 | 6.23,90.49 5.68,90.49 J4.P4 | 6.23,90.49 6.86,91.12 6.86,100.53 | 6.99,56.56 6.99,87.51 7.27,87.79 7.27,89.52 6.37,90.42 6.23,90.49 | J3.2 164.47,18.75 153.8,18.75 131.99,40.56 C1_BAT2.1 131.85,40.63 127.49,40.63 127.35,40.77 C3.+ 127.21,40.91 124.1,44.03 122.85,44.03 IC4.5 122.78,43.89 122.78,43.75 120.29,41.25 99.31,41.25 93.56,47 86.77,47 R1_PINH1.2 86.63,47.07 85.35,45.79 | U1.8 44.32,47.42 44.32,46.24 U1.7 44.25,46.1 44.25,45.96 42.45,44.16 42.45,43.33 40.2,41.08 | R6.2 37.4,31.7 41.69,31.7 41.76,31.77 R7.2 41.83,31.91 42.38,31.91 | 42.38,31.91 45.7,31.91 R8.2 45.84,32.04 65.79,32.04 67.86,34.12 R9.2 68,34.19 69.53,34.19 70.77,35.44 73.68,35.44 74.34,34.78 | 42.38,31.91 42.38,38.62 41.69,39.32 41.69,39.45 R5.2 41.69,39.59 40.2,41.08 | 40.2,41.08 36.56,44.72 36.56,44.92 U1.3 36.42,44.99 24.86,56.56 6.99,56.56 | 88.67,63.8 91.41,61.06 R2_PINH1.2 | 88.67,63.8 86.91,65.56 86.91,65.84 D7.2 86.77,65.49 86.56,65.49 82.68,61.61 82.68,48.46 85.35,45.79 | 88.67,63.8 87.39,62.51 87.32,62.51 84.62,59.81 84.62,59.4 U3.2 | 74.34,34.78 75.14,33.98 75.14,33.84 Q2.3 75.21,33.71 73.68,32.18 72.5,32.18 71.74,32.94 70.91,32.94 R_CL1.1
  Top 0.3: 74.34,34.78 85.35,45.79
32KHZ  (via drill 0.3)
  Top 0.15: R2_PINH1.1 91.41,59.74 86.22,59.74 85.87,59.4 U3.1 85.8,59.33 85.8,58.98 v84.76,57.94 | v17.94,52.96 17.94,38.07 U2.9
  Bottom 0.15: v17.94,52.96 20.01,55.03 81.85,55.03 v84.76,57.94
DN  (via drill 0.3)
  Top 0.15: 161.7,53.58 162.04,53.23 163.15,53.23 J2.B7 | 161.7,53.58 161.7,53.86 162.04,54.2 163.15,54.2 J2.A7 | v151.31,53.58 150.83,53.1 150.34,53.1 D1.1 | v161.56,53.58 161.7,53.58
  Bottom 0.15: v161.56,53.58 v151.31,53.58
DP  (via drill 0.3)
  Top 0.15: v162.18,53.72 163.15,53.72 J2.A6 | v162.18,54.69 163.15,54.69 J2.B6 | v151.87,51.99 151.03,51.16 150.34,51.16 D1.3
  Bottom 0.15: v162.18,54.69 v162.18,53.72 162.18,53.58 160.59,51.99 v151.87,51.99
EPD_3V3
  Top 0.3: 83.52,34.95 79.5,34.95 78.39,33.84 C7.1 | 83.52,34.95 86.36,37.79 86.36,37.93 L1.2 | TP17.TP 4.09,4.21 7.62,4.21 9.35,2.47 34.35,2.47 43.56,11.68 84.28,11.68 86.98,14.39 86.98,14.8 J1.16 87.05,14.94 87.46,14.94 J1.15 87.53,15.08 87.53,15.42 87.74,15.63 90.58,15.63 94.46,19.51 94.46,20.2 95.56,21.31 EPD_C5.2 95.5,21.45 83.58,33.36 83.58,34.81 83.52,34.95
EPD_3V3_C
  Top 0.3: 72.64,34.33 70.91,34.33 R_CL1.2 70.77,34.19 70.57,34.19 66.06,29.69 32.34,29.69 | 72.64,34.33 73.06,34.75 Q2.1 | Q2.2 73.06,32.88 73.06,33.84 72.71,34.19 72.64,34.33 | 32.34,29.69 32.34,3.86 TP13.TP | 32.34,29.69 32.34,31.56 20.5,43.4 20.5,55.45 U2.18
EPD_BUSY  (via drill 0.3)
  Top 0.15: v90.79,14.11 90.51,14.39 90.51,14.87 J1.9 | v77.28,11.13 v88.92,11.13 | v10.8,3.86 9.76,3.86 9.49,4.14 TP9.TP | v15.37,39.18 15.37,47.21 10.32,52.27 10.32,55.45 U2.26
  Bottom 0.15: v90.79,14.11 90.79,13 v88.92,11.13 | v77.28,11.13 77.14,11.13 69.87,3.86 12.4,3.86 | v10.8,3.86 12.4,3.86 | v15.37,39.18 15.37,38 12.4,35.02 12.4,3.86
EPD_CS  (via drill 0.3)
  Top 0.15: v88.99,14.11 88.99,14.87 J1.12 | v81.3,18.75 81.3,19.37 70.7,29.97 70.57,29.97 D6.2 70.5,30.04 v69.8,30.73 | v67.73,32.11 67.93,32.32 67.93,32.81 R9.1 | v22.37,35.85 20.5,37.72 20.5,38 U2.11 | v41.9,9.26 41.9,3.58 TP10.TP
  Bottom 0.15: v88.99,14.11 86.98,14.11 82.34,18.75 v81.3,18.75 | v69.8,30.73 68.42,32.11 v67.73,32.11 67.66,32.11 59.35,23.8 41.9,23.8 | v22.37,35.85 25.97,35.85 38.02,23.8 41.9,23.8 | 41.9,23.8 v41.9,9.26
EPD_DC  (via drill 0.3)
  Top 0.15: v86.7,13.35 86.91,13.14 88.78,13.14 89.47,13.83 89.47,14.87 J1.11 | v75.14,12.58 74.65,12.1 35.87,12.1 v32.89,9.12 | v16.97,4.34 15.93,4.34 15.65,4.07 TP11.TP | v12.88,34.88 12.88,38 U2.5
  Bottom 0.15: v86.7,13.35 75.9,13.35 v75.14,12.58 | v32.89,9.12 31.16,9.12 26.38,4.34 v16.97,4.34 16.97,4.41 12.88,8.5 v12.88,34.88
EPD_RST  (via drill 0.3)
  Top 0.15: v90.23,13.83 90.03,14.04 90.03,14.87 J1.10 | v38.71,3.37 37.6,3.37 37.4,3.58 TP12.TP 37.4,3.65 37.67,3.93 v37.67,4.97 | v16.69,39.18 16.69,55.45 U2.21
  Bottom 0.15: v90.23,13.83 90.23,13.62 90.37,13.48 90.37,13.21 87.46,10.3 76.73,10.3 69.8,3.37 v38.71,3.37 | v16.69,39.18 16.69,37.52 18.49,35.72 18.49,24.15 v37.67,4.97
FLASH_CS  (via drill 0.3)
  Top 0.15: R5.1 41.62,38.21 40.1,38.21 38.78,39.52 D9.2 38.71,39.59 v38.02,40.28 | v35.87,46.79 36.49,47.42 U1.1 | v23.13,39.94 21.74,38.55 21.74,38.07 U2.12
  Bottom 0.15: v35.87,46.79 35.87,45.83 35.18,45.13 35.18,43.12 | v38.02,40.28 35.18,43.12 | v23.13,39.94 31.92,39.94 35.11,43.12 35.18,43.12
GDR
  Top 0.15: J1.2 93.97,14.87 93.97,14.52 90.09,10.65 76.66,10.65 76.59,10.71 R4.2 76.52,10.71 75.76,9.95 72.37,9.95 71.53,10.79 71.33,10.79 Q3.1
GND  (via drill 0.3)
  Top 0.15: U4.9 136.7,53.23 136.08,52.61 135.73,52.61 U4.4 135.66,52.54 135.66,49.91 133.79,48.04 128.67,48.04 126.55,50.15 | U4.1 135.73,54 136.08,54 136.63,53.44 136.63,53.3 U4.9 | U4.6 137.6,53.1 136.91,53.1 136.77,53.23 U4.9 | 123.47,53.51 125.83,55.87 127.91,55.87 C2_BAT.2 127.97,55.94 134.34,55.94 142.24,63.83 143.35,63.83 151.59,55.59 151.59,55.52 | 123.47,53.51 123.47,52.75 123.96,52.27 124.23,52.27 MCP73831.2 124.3,52.13 124.58,52.13 126.55,50.15 | C1_BAT.2 118.62,51.02 122.02,47.62 R2_BAT.1 122.02,47.56 v122.02,45.55 | v121.19,41.39 121.19,39.25 C1_BAT1.2 121.12,39.25 101.94,20.06 95.7,20.06 EPD_C5.1 95.56,19.99 92.9,17.33 | v120.84,42.57 120.7,42.57 120.46,42.81 | 120.46,42.81 120.22,43.05 120.08,43.05 IC4.2 | C1_BAT2.2 131.85,41.95 129.15,41.95 127.28,43.82 C3.- 127.21,43.89 126.52,44.58 122.23,44.58 120.46,42.81 | v125.69,49.29 126.55,50.15 | D3.1 82.27,44.65 82.27,49.77 82.06,49.98 U3.13 82.06,50.05 82.06,51.36 v82.13,51.43 | 112.53,43.54 103.04,43.54 94.67,51.92 C10_SUPERCAP.1 94.6,51.92 93.63,50.95 89.82,50.95 C8.2 89.75,50.95 v89.12,51.57 | 112.53,43.54 114.4,43.54 R1_PWRUSB.2 | 123.47,53.51 122.92,53.51 122.43,54 113.02,54 112.53,53.51 112.53,43.54 | C2.2 150.48,7.94 152.7,7.94 C1.2 152.77,8.01 152.77,10.51 154.29,12.03 154.29,12.31 SENSOR2.5 | 153.25,13.07 152.77,12.58 152.77,12.38 152.74,12.34 | 153.25,13.07 153.87,13.07 154.36,12.58 154.36,12.38 SENSOR2.5 | SENSOR2.2 152,15.22 152,14.39 153.25,13.14 153.25,13.07 | SENSOR2.5 154.43,12.58 159.48,17.64 164.47,17.64 J3.1 164.54,17.71 164.81,17.71 165.44,18.33 165.44,48.87 | J2.A1 163.22,50.67 163.22,50.88 J2.B12
  Top 0.15: J2.A1 163.22,50.6 163.22,49.36 163.71,48.87 J2.MP3 163.78,48.87 165.44,48.87 | 165.44,48.87 167.65,48.87 J2.MP1 | J2.A12 163.22,57.25 163.22,57.04 J2.B1 163.15,56.97 159.21,56.97 156.99,54.76 156.92,54.76 | J2.A12 163.22,57.32 163.22,58.57 163.71,59.05 J2.MP4 163.78,59.12 167.65,59.12 J2.MP2 | J2.A1 163.29,50.47 164.54,50.47 164.88,50.81 164.88,57.11 164.54,57.46 163.29,57.46 J2.A12 | 151.55,47.73 152.7,48.87 R2-USB.2 | 151.55,47.73 151.45,47.62 151.45,46.45 R2-USB1.1 | 151.55,47.73 150.83,48.46 150.83,50.33 152.56,52.06 152.77,52.06 D1.5 152.84,52.13 155.26,52.13 156.92,53.79 156.92,54.76 | 151.59,55.52 148.61,52.54 146.95,52.54 C4_USB.2 | 151.59,55.52 156.23,55.52 C5_USB.2 156.23,55.45 156.92,54.76 | C5.2 27.91,107.8 26.66,107.8 25.83,106.97 RESET_BUTTON.2 25.76,106.97 22.3,106.97 RESET_BUTTON.1 22.23,106.97 20.98,108.22 20.98,108.43 20.77,108.64 16.14,108.64 | 16.14,108.64 12.6,108.64 5.75,101.78 C9.2 5.61,101.78 5.61,101.57 2.98,98.94 2.98,95.55 J4.G4 2.98,95.48 2.98,94.85 5.12,92.71 5.61,92.71 J4.P6 5.12,92.64 2.01,89.52 2.01,82.39 J4.G3 2.01,82.32 2.01,60.37 6.58,55.8 6.58,43.19 8.38,41.39 v8.38,41.32 8.38,38.9 7.76,38.28 7.76,38.07 U2.1 7.76,38 7.76,24.63 | 16.07,95.62 16.07,98.73 D8.1 16.14,98.8 v16.14,99.63 | 16.07,95.62 15.37,94.92 15.37,91.95 16.2,91.12 J4.G2 16.27,91.05 17.04,90.28 17.04,87.24 16.27,86.48 16.27,85.44 J4.G1 | C10.2 68.42,108.08 67.52,108.08 66.41,106.97 CHANGE_BUTTON.2 66.27,106.97 62.88,106.97 CHANGE_BUTTON.1 | BOOT_BUTTON.1 47.3,106.97 50.76,106.97 BOOT_BUTTON.2 50.83,106.97 51.94,108.08 53.05,108.08 C6.2 53.18,108.15 53.6,108.56 61.42,108.56 61.56,108.43 61.56,108.22 62.81,106.97 CHANGE_BUTTON.1
  Top 0.15: CHANGE_BUTTON.1 62.74,106.97 51.18,95.41 C_DELAY.2 51.11,95.41 50,96.52 47.3,96.52 47.09,96.31 47.09,96.03 45.15,94.09 45.01,94.09 IC1.3 44.94,94.09 32.2,94.09 30.68,95.62 16.07,95.62 | v16.14,108.56 16.14,108.64 | U2.29_1 12.26,44.03 12.26,45.2 U2.29_2 12.33,45.2 13.43,45.2 U2.29_5 | U2.29_1 12.33,44.03 13.43,44.03 U2.29_4 13.5,44.03 14.68,44.03 U2.29_7 14.75,44.03 14.75,45.2 U2.29_8 14.75,45.27 14.75,46.45 U2.29_9 14.68,46.52 13.5,46.52 U2.29_6 13.43,46.52 12.26,46.52 U2.29_3 12.26,46.59 12.26,49.91 7.76,54.41 7.76,55.45 U2.28 | 7.76,24.63 9.76,22.63 TP5.TP | TP4.TP 3.6,22.63 5.68,22.63 7.69,24.63 7.76,24.63 | v11.01,43.95 12.19,43.95 U2.29_1 | EPD_C6.2 93.69,21.24 91.96,21.24 EPD_C7.2 91.89,21.17 89.75,21.17 EPD_C8.2 89.68,21.1 EPD_C9.2 87.67,21.1 86.01,21.1 EPD_C10.2 85.94,21.03 84.07,21.03 EPD_C11.2 84,21.1 v83.38,21.73 79.71,25.4 79.71,33.78 C7.2 | 36.56,43.19 36.56,40.22 38.71,38.07 D9.1 | 36.56,43.19 36.56,43.61 U1.4 | v37.33,43.19 36.56,43.19 | v38.36,44.23 39.06,44.23 40.37,45.55 U1.9 | 92.9,17.33 91,15.42 91,14.94 J1.8 | 92.9,17.33 95.43,14.8 95.43,12.45 J1.MP1 95.36,12.45 92.31,12.45 90.16,10.3 77.28,10.3 76.04,9.05 v74.03,9.05 71.53,6.56 R2.1 71.47,6.49 71.19,6.49 69.67,4.97 68.35,4.97 67.52,5.8 67.52,5.94 SJ1.1 | 38.5,23.87 41.62,23.87 41.76,24.01 D11.1 41.83,24.08 45.77,24.08 D12.1 45.84,24.15 63.16,24.15 68.97,29.97 D6.1 69.04,30.04 69.04,30.59 69.67,31.21 70.64,31.21 81.75,20.1 | 38.5,23.87 37.74,23.87 D10.1 | v74.51,11.13 74.86,10.79 75.21,10.79 R4.1 | v74.51,12.58 74.51,13.21 74.58,13.28 EPD_C2.1 74.65,13.35 76.31,13.35 76.45,13.48 EPD_C1.1 76.52,13.48 77.84,13.48 78.94,12.38 81.92,12.38 J1.MP2
  Top 0.15: J1.MP2 81.99,12.45 84.42,12.45 86.42,14.45 86.42,14.87 J1.17 | 81.75,20.1 81.72,20.06 81.72,18.96 81.99,18.68 81.99,12.52 J1.MP2 | 81.75,20.1 82.34,20.69 82.34,20.89 EPD_C12.2 | 38.5,23.87 v38.5,24.56
  Bottom 0.15: v121.19,41.39 121.19,42.22 v120.84,42.57 120.84,42.64 122.02,43.82 v122.02,45.55 122.02,45.62 v125.69,49.29 | v82.13,51.43 82.55,51.43 83.24,52.13 88.57,52.13 v89.12,51.57 | v16.14,99.63 v16.14,108.56 | v8.38,41.32 v11.01,43.95 11.22,43.95 15.51,39.66 21.88,39.66 22.85,38.69 38.5,38.69 | v38.36,44.23 v37.33,43.19 37.33,41.6 38.5,40.42 38.5,38.69 | v74.03,9.05 74.03,10.58 74.51,11.06 v74.51,11.13 v74.51,12.58 74.51,12.65 83.38,21.52 v83.38,21.73 | v38.5,24.56 38.5,38.69
  pour Top: 182.42,-7.72 182.42,75.72 102.58,75.72 102.56,75.74 102.54,75.76 102.52,75.78 102.52,115.12 -5.72,115.12 -5.72,-7.72
  pour Bottom: 178.32,-5.62 178.32,71.42 106.18,71.42 106.16,71.44 106.14,71.46 106.12,71.48 106.12,71.52 106.14,71.54 106.16,71.56 106.18,71.58 106.42,71.58 106.42,116.92 -3.02,116.92 -3.02,-5.62
GPIO8  (via drill 0.3)
  Top 0.15: v18.97,33.64 19.04,33.64 19.67,33.01 R1.1 | v18.97,36.89 18.97,37.86 19.11,38 U2.10
  Bottom 0.15: v18.97,36.89 v18.97,33.64
I2C_PW  (via drill 0.3)
  Top 0.15: R1_PINH.2 157.82,8.08 155.26,8.08 R2_PINH.2 155.19,8.01 154.77,8.01 153.46,6.7 152.77,6.7 C1.1 152.7,6.63 150.48,6.63 C2.1 150.48,6.7 149.72,7.46 149.72,8.85 152.42,11.55 152.42,11.61 | 152.42,11.61 152,12.03 152,12.31 SENSOR2.6 151.94,12.38 151.45,12.86 151.45,15.84 | 152.42,11.61 153.04,11.61 153.53,12.1 153.53,12.31 SENSOR2.7 | 151.45,15.84 151.59,15.98 152.28,15.98 152.7,15.56 152.7,15.29 SENSOR2.1 | v35.66,44.99 31.99,44.99 21.74,55.24 21.74,55.45 U2.17 | 151.45,15.84 v146.12,15.84
  Bottom 0.15: v35.66,44.99 116.96,44.99 v146.12,15.84
INT_RTC  (via drill 0.3)
  Top 0.15: v85.32,48.73 85.32,47.56 | 85.32,47.56 85.32,47.14 R1_PINH1.1 | v83.38,51.64 83.38,59.26 83.31,59.33 U3.3 | v16.69,36.89 16.69,38 U2.8 16.69,38.07 16.69,38.35 17.45,39.11 v17.45,40.15 | v26.25,4.83 27.21,3.86 TP15.TP | v84.35,47.56 85.32,47.56
  Bottom 0.15: v85.32,48.73 85.32,49.7 v83.38,51.64 | v16.69,36.89 16.69,14.39 v26.25,4.83 | v84.35,47.56 35.73,47.56 35.39,47.9 25.21,47.9 v17.45,40.15
IO/BOOT  (via drill 0.3)
  Top 0.15: R_BOOT.2 45.22,107.94 46.74,107.94 47.23,108.43 BOOT_BUTTON.4 47.3,108.5 50.76,108.5 BOOT_BUTTON.3 50.83,108.5 50.9,108.56 v51.87,108.56 | v52.28,107.6 53.05,106.83 C6.1 | v25.07,55.52 24.31,55.52 U2.15
  Bottom 0.15: v51.87,108.56 52.28,108.15 v52.28,107.6 52.28,107.53 14.27,69.51 14.27,54.27 14.61,53.93 14.89,53.93 16.48,55.52 v25.07,55.52
IO/CHANGE  (via drill 0.3)
  Top 0.15: C10.1 68.49,106.83 68.49,107.04 69.11,107.67 69.11,108.56 68.97,108.7 66.62,108.7 66.41,108.5 CHANGE_BUTTON.3 66.34,108.5 62.88,108.5 CHANGE_BUTTON.4 62.81,108.5 62.46,108.84 v61.77,108.84 | v61.7,107.46 61.22,107.94 60.94,107.94 R_CHANGE.2 | v14.75,54.41 14.13,55.03 14.13,55.45 U2.23
  Bottom 0.15: v61.77,108.84 61.7,108.77 v61.7,107.46 61.7,107.39 14.75,60.44 v14.75,54.41
MISO  (via drill 0.3)
  Top 0.15: v46.54,30.24 46.12,30.66 45.77,30.66 R8.1 | v46.54,26.37 45.84,25.67 D12.2 | v40.16,41.88 39.96,41.88 37.88,43.95 37.88,44.58 36.56,45.89 36.56,46.17 U1.2 | v9.63,54.41 9.07,54.97 9.07,55.45 U2.27 | v11.08,57.11 24.93,57.11 35.8,46.24 36.49,46.24 U1.2 | v4.71,93.75 5.75,93.75 J4.P7 | TP6.TP 84.9,96.93 84.9,94.72 36.49,46.31 U1.2
  Bottom 0.15: v46.54,26.37 v46.54,30.24 46.54,30.31 40.16,36.68 v40.16,41.88 | v9.63,54.41 9.63,55.66 v11.08,57.11 11.08,57.18 5.96,62.31 5.96,64.52 7.83,66.39 7.83,90.42 4.71,93.54 v4.71,93.75
MOSI  (via drill 0.3)
  Top 0.15: v88.02,13.62 88.02,14.87 J1.14 | v61.29,25.12 48.41,25.12 46.67,26.85 43.14,26.85 | 43.14,26.85 41.83,25.54 D11.2 | v42.59,30.24 42.38,30.45 41.83,30.45 R7.1 | v42.59,27.47 43.14,26.92 43.14,26.85 | v43.77,32.46 44.32,33.01 44.32,43.61 U1.5 | v31.79,30.66 31.79,31.56 27.98,35.37 17.59,35.37 15.37,37.58 15.37,38 U2.7 15.37,38.07 15.86,38.55 15.86,47.14 12.05,50.95 v12.05,53.58 | v4.02,90.42 5.05,89.38 5.75,89.38 J4.P3 | v17.17,92.08 71.53,92.08 76.38,96.93 79.78,96.93 TP7.TP
  Bottom 0.15: v88.02,13.62 88.5,13.14 89.06,13.14 89.75,13.83 89.75,16.39 81.02,25.12 v61.29,25.12 | v43.77,32.46 43.77,31.49 42.59,30.31 v42.59,30.24 v42.59,27.47 42.52,27.47 39.13,24.08 38.36,24.08 v31.79,30.66 | v4.02,90.42 4.02,93.68 4.57,94.23 4.85,94.23 12.05,87.03 | v12.05,53.58 12.05,87.03 | v17.17,92.08 12.12,87.03 12.05,87.03
N$1
  Top 0.15: R2-USB1.2 152.77,46.45 153.46,46.45 159.69,52.68 163.15,52.68 J2.A5
N$3
  Top 0.15: R2-USB.1 151.59,48.94 153.25,50.6 157.2,50.6 162.25,55.66 163.15,55.66 J2.B5
N$5  (via drill 0.3)
  Top 0.15: v119.87,40.7 119.87,39.25 C1_BAT1.1 | v119.18,41.81 119.73,41.81 120.01,42.09 IC4.3 | D2.1 117.17,41.88 119.18,41.88 v119.18,41.81 | v119.18,41.81 119.18,43.33 119.87,44.03 120.01,44.03 IC4.1 120.08,44.09 121.05,45.06 131.92,45.06 133.44,46.59 134.21,46.59 Q1.2
  Bottom 0.15: v119.87,40.7 119.87,41.12 v119.18,41.81
N$7  (via drill 0.3)
  Top 0.15: 92.97,37.48 91.62,36.13 91.27,36.13 D4.1 | 92.97,37.48 95.22,39.73 98.27,39.73 C4.1 | v89.68,40.7 D3.2 | v92.86,37.52 92.93,37.52 92.97,37.48
  Bottom 0.15: v92.86,37.52 v89.68,40.7
N$8
  Top 0.15: R2_BAT.2 122.02,48.94 122.02,50.95 121.74,51.23 MCP73831.5
N$9
  Top 0.15: R1_BAT.2 114.47,53.03 115.16,53.03 115.86,53.72 122.3,53.72 123.2,52.82 123.2,52.06 123.96,51.3 124.23,51.3 MCP73831.1
N$10
  Top 0.15: CHG_LED.C 117.31,53.03 115.58,53.03 114.82,52.27 113.85,52.27 113.15,52.96 R1_BAT.1
N$11
  Top 0.15: J1.18 86.01,14.94 86.01,15.29 89.68,18.96 92.66,18.96 93.69,19.99 EPD_C6.1
N$12  (via drill 0.3)
  Top 0.15: v85.45,65.15 84.76,65.84 D7.1 | v86.49,64.11 86.49,63.62 86.84,63.28 R_CAPACITOR.2
  Bottom 0.15: v86.49,64.11 v85.45,65.15
N$13  (via drill 0.3)
  Top 0.15: v86.22,12.86 91.34,12.86 92.93,14.45 92.93,14.87 J1.4 | v79.08,12.86 77.14,14.8 76.52,14.8 EPD_C1.2
  Bottom 0.15: v79.08,12.86 v86.22,12.86
N$14  (via drill 0.3)
  Top 0.15: v89.89,13.35 91.34,13.35 92.45,14.45 92.45,14.87 J1.5 | v77.21,14.11 75.14,14.11 74.65,14.59 EPD_C2.2
  Bottom 0.15: v89.89,13.35 89.68,13.35 89.19,12.86 87.81,12.86 86.56,14.11 v77.21,14.11
N$15
  Top 0.15: J1.19 85.52,14.94 85.52,15.29 89.47,19.23 91.27,19.23 91.89,19.86 EPD_C7.1
N$16
  Top 0.15: J1.20 85.04,14.94 85.04,15.29 89.54,19.79 89.68,19.79 EPD_C8.1
N$18
  Top 0.15: J1.22 84,14.94 84,17.78 85.94,19.72 EPD_C10.1
N$20
  Top 0.15: J1.24 82.96,14.94 82.96,19.09 82.41,19.65 EPD_C12.1
N$21
  Top 0.15: C_DELAY.1 51.11,94.09 49.65,94.09 47.85,95.89 IC1.5
PREVGH  (via drill 0.3)
  Top 0.15: J1.21 84.55,14.94 84.55,16.67 87.67,19.79 EPD_C9.1 87.74,19.79 v88.43,20.48 | v91.13,36.89 94.46,40.22 D5.2
  Bottom 0.15: v91.13,36.89 91.13,23.18 v88.43,20.48
PREVGL
  Top 0.15: J1.23 83.52,14.94 83.52,19.23 84,19.72 EPD_C11.1 84,19.79 83.31,20.48 83.31,21.17 77.77,26.71 77.77,37.31 81.3,40.84 86.98,40.84 87.12,40.7 87.12,38.9 90.58,35.44 91.89,35.44 92.52,36.06 94.73,36.06 D4.2
RESE  (via drill 0.3)
  Top 0.15: v84.97,11.61 90.58,11.61 93.49,14.52 93.49,14.87 J1.3 | v74.51,10.44 72.99,10.44 72.64,10.79 Q3.2 | v70.7,8.36 69.73,8.36 R3.2
  Bottom 0.15: v84.97,11.61 75.69,11.61 v74.51,10.44 74.51,8.91 73.96,8.36 v70.7,8.36
RESE'
  Top 0.15: 69.87,6.84 69.04,6.01 SJ1.2 | 69.87,6.84 70.84,7.81 71.47,7.81 R2.2 | 69.87,6.84 68.42,8.29 R3.1
RESET  (via drill 0.3)
  Top 0.15: 28.43,107.28 28.6,107.46 28.6,108.29 28.46,108.43 25.83,108.43 RESET_BUTTON.3 25.76,108.5 22.3,108.5 RESET_BUTTON.4 | 28.43,107.28 27.98,106.83 27.98,106.63 C5.1 | 31.02,95.96 20.29,106.7 R_RESET.2 | 31.02,95.96 44.94,95.96 IC1.1 | v10.32,51.23 10.32,38.07 U2.3 | v31.02,95.89 31.02,95.96 | v28.74,106.97 28.43,107.28
  Bottom 0.15: v10.32,51.23 13.99,54.9 13.99,78.86 v31.02,95.89 31.02,95.96 28.74,98.25 v28.74,106.97
RTC_RST  (via drill 0.3)
  Top 0.15: v26.11,54.55 23.68,54.55 22.99,55.24 22.99,55.45 U2.16 | v77.56,54.55 81.99,58.98 81.99,59.33 U3.4
  Bottom 0.15: v77.56,54.55 v26.11,54.55
RX  (via drill 0.3)
  Top 0.15: v12.81,54.34 12.81,55.45 U2.24 | v12.81,64.04 12.81,65.35 TP2.TP
  Bottom 0.15: v12.81,64.04 v12.81,54.34
SCK  (via drill 0.3)
  Top 0.15: v88.64,13.62 88.5,13.76 88.5,14.87 J1.13 | v60.8,24.63 46.54,24.63 46.33,24.84 38.85,24.84 38.36,25.33 37.74,25.33 D10.2 37.67,25.4 v36.49,26.57 | R6.1 37.33,30.31 v36.49,30.31 36.63,30.38 36.63,32.04 v41.06,36.48 | v44.32,44.23 U1.6 44.39,44.99 86.15,86.75 86.15,97.48 85.39,98.25 77.28,98.25 76.04,97 74.79,97 TP8.TP | v27.84,34.88 16.97,34.88 14.13,37.72 14.13,38 U2.6 14.06,38.07 14.06,38.28 v13.16,39.18 | v4.5,90.77 5.26,91.53 5.75,91.53 J4.P5
  Bottom 0.15: v88.64,13.62 89.12,13.62 89.47,13.97 89.47,16.25 81.09,24.63 v60.8,24.63 | v36.49,26.57 v36.49,30.31 36.42,30.31 31.86,34.88 v27.84,34.88 | v44.32,44.23 44.32,39.73 v41.06,36.48 | v4.5,90.77 4.5,57.88 7.89,54.48 7.89,41.19 9.9,39.18 v13.16,39.18
SCL  (via drill 0.3)
  Top 0.15: R2_PINH.1 155.19,6.7 153.87,6.7 153.18,6.01 149.93,6.01 145.63,10.3 145.63,15.98 146.32,16.67 153.18,16.67 154.29,15.56 154.29,15.29 SENSOR2.3 154.36,15.56 v156.99,18.19 | v143.62,47.9 138.01,53.51 137.67,53.51 U4.7 | 162.01,23.21 164.47,20.76 J3.4 | 162.01,23.21 v143.62,41.6 | v161.98,23.18 162.01,23.21 | v19.94,53.23 17.94,55.24 17.94,55.45 U2.20 | v85.8,48.39 85.8,49.98 U3.16
  Bottom 0.15: v143.62,41.6 v143.62,47.9 127.7,47.9 125.83,49.77 87.25,49.77 85.87,48.39 v85.8,48.39 85.66,48.25 31.37,48.25 26.38,53.23 v19.94,53.23 | v161.98,23.18 v156.99,18.19
SDA  (via drill 0.3)
  Top 0.15: v19.94,54.34 19.18,55.1 19.18,55.45 U2.19 | v83.93,48.87 83.93,49.36 84.55,49.98 U3.15 | v144.25,47.9 138.15,54 137.67,54 U4.8 | v152.84,16.19 153.53,15.49 153.53,15.29 SENSOR2.4 | v156.99,7.6 157.82,6.77 R1_PINH.1 | v163.43,19.3 163.78,19.65 164.47,19.65 J3.3
  Bottom 0.15: v19.94,54.34 25.69,54.34 31.16,48.87 81.65,48.87 | v83.93,48.87 81.65,48.87 | v156.99,7.6 156.99,11.96 156.54,12.41 | 156.54,12.41 152.84,16.12 v152.84,16.19 144.25,24.77 v144.25,47.9 144.25,47.97 139.82,52.4 82.48,52.4 81.65,51.57 81.65,48.87 | 156.54,12.41 v163.43,19.3
SRC  (via drill 0.3)
  Top 0.15: C4.2 98.27,41.05 91.76,41.05 91,40.28 D5.1 90.92,40.22 v87.6,40.22 | v71.95,28.1 71.95,12.93 Q3.3 | v80.97,37.41 81.34,37.78 L1.1
  Bottom 0.15: v71.95,28.1 71.95,28.4 v80.97,37.41 81.34,37.41 84.14,40.22 v87.6,40.22
SS_SD  (via drill 0.3)
  Top 0.15: D8.2 17.59,98.8 15.86,100.53 8.66,100.53 R10.1 8.66,100.46 8.66,91.6 v7.34,90.28 | v12.6,43.19 11.56,42.16 11.56,38.07 U2.4 | v5.05,87.93 5.82,87.93 6.16,88.28 J4.P2
  Bottom 0.15: v12.6,43.19 12.6,48.32 8.17,52.75 8.17,59.67 5.05,62.79 v5.05,87.93 5.05,88 v7.34,90.28
TX  (via drill 0.3)
  Top 0.15: v11.56,54.34 11.56,55.45 U2.25 | v6.44,64.38 5.47,65.35 TP1.TP
  Bottom 0.15: v11.56,54.34 11.56,59.26 v6.44,64.38
USB_D+  (via drill 0.3)
  Top 0.15: v151.87,50.74 152.21,51.09 152.77,51.09 D1.4 | v42.52,47.07 v48.13,52.68 | v26.59,38.14 v28.88,40.42 | v25.07,38.07 24.31,38.07 U2.14
  Bottom 0.15: v151.87,50.74 141.89,50.74 139.95,52.68 v48.13,52.68 | v42.52,47.07 36.22,47.07 36.01,47.28 35.73,47.28 v28.88,40.42 | v26.59,38.14 25.14,38.14 v25.07,38.07
USB_D-  (via drill 0.3)
  Top 0.15: v151.87,52.61 152.28,53.03 152.77,53.03 D1.6 | v35.25,47.42 v41,53.17 | v22.99,39.18 22.99,38.07 U2.13
  Bottom 0.15: v151.87,52.61 140.44,52.61 139.88,53.17 v41,53.17 | v35.25,47.42 29.98,47.42 22.64,40.08 22.64,39.52 v22.99,39.18
VBAT
  Top 0.3: MCP73831.3 124.3,53.17 125.69,54.55 127.91,54.55 C2_BAT.1 128.04,54.48 129.84,54.48 133.17,51.16 133.31,51.09 | 133.31,51.09 133.31,48.73 Q1.3 | 133.31,51.09 135.25,53.03 135.52,53.03 U4.3 135.66,53.1 135.66,53.51 U4.2 135.52,53.58 135.25,53.58 134.97,53.86 134.97,54.27 139.75,59.05 142.79,59.05 TP3.TP
VBUS
  Top 0.3: R1_PWRUSB.1 114.47,42.22 115.3,42.22 117.1,44.03 D2.2 117.17,44.16 117.17,50.81 117.31,50.95 C1_BAT.1 117.45,51.09 118.76,52.4 118.76,53.03 CHG_LED.A 118.97,53.1 121.53,53.1 MCP73831.4 121.74,53.1 121.74,52.47 127.56,46.66 132.27,46.66 Q1.1 132.41,46.72 133.03,46.72 133.65,47.35 146.05,47.35 | C4_USB.1 146.95,51.3 149.16,51.3 149.93,52.06 150.27,52.06 D1.2 150.48,52.06 150.69,52.06 151.24,52.61 151.24,52.75 152.7,54.2 156.23,54.2 C5_USB.1 | TP14.TP 142.79,62.58 142.79,60.99 146.19,57.6 146.19,51.99 146.81,51.36 C4_USB.1 | 146.05,47.35 146.05,50.26 146.88,51.09 C4_USB.1 | 146.05,47.35 146.05,40.22 146.26,40.01 147.99,40.01 150.06,42.09 151.59,42.09 PFMF.050.1.2
VRTC
  Top 0.3: C10_SUPERCAP.2 94.6,49.7 94.53,49.63 89.82,49.63 C8.1 89.68,49.7 87.88,49.7 86.22,51.36 83.93,51.36 | 83.93,51.36 83.93,50.67 U3.14 | 83.93,51.36 83.93,60.44 85.52,62.03 85.52,63.21 R_CAPACITOR.1
VUSB
  Top 0.3: J2.A9 163.22,56.49 163.22,56.21 J2.B4 163.36,56.14 163.91,56.14 164.05,56 164.05,51.92 163.84,51.71 163.36,51.71 J2.B9 163.22,51.64 163.22,51.43 J2.A4 163.08,51.36 158.93,51.36 151.8,44.23 149.23,44.23 147.16,42.16 PFMF.050.1.1